# Altium PCB POE-3V3-PCB.PcbDoc
Units mm, origin at the board's own origin, x right, y up, seen from the top; angles counter-clockwise.
Board outline 146.2 x 36.4 mm, 4 copper layers (L1 (Signal), L2 (GND), L3 (GND), L4 (Signal)), stack 1.586 mm thick; 48 components, 33 nets, 149 pads, 19 vias.
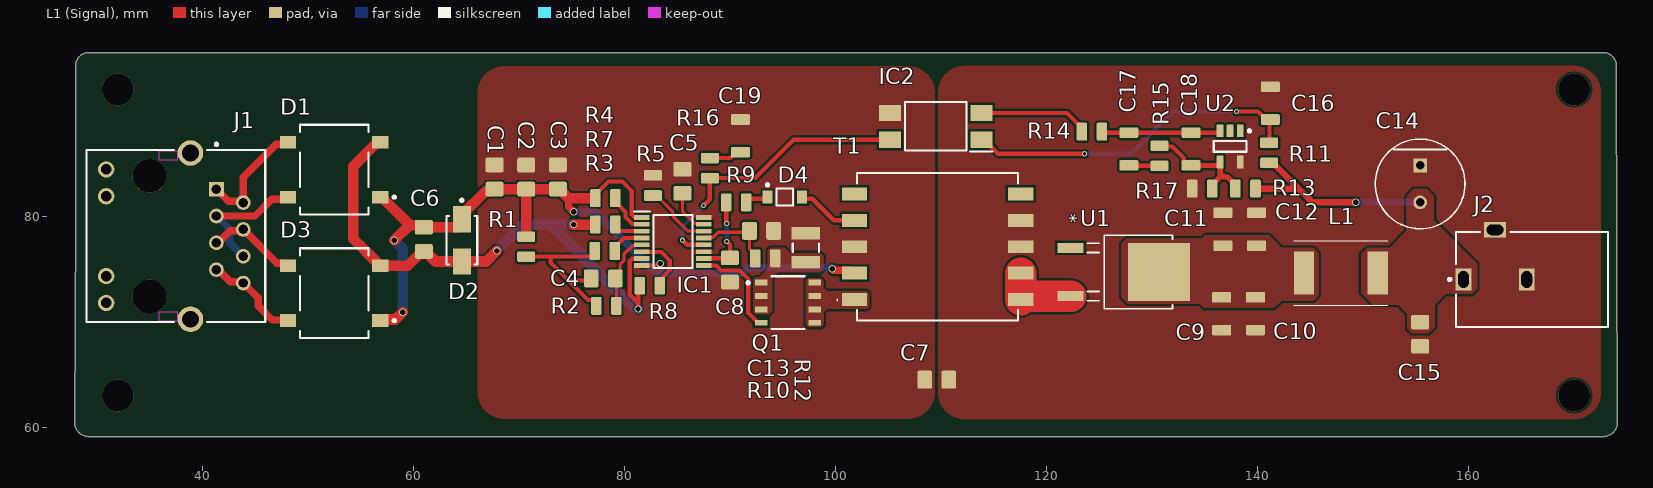
[diagram p0: L1 (Signal) view]
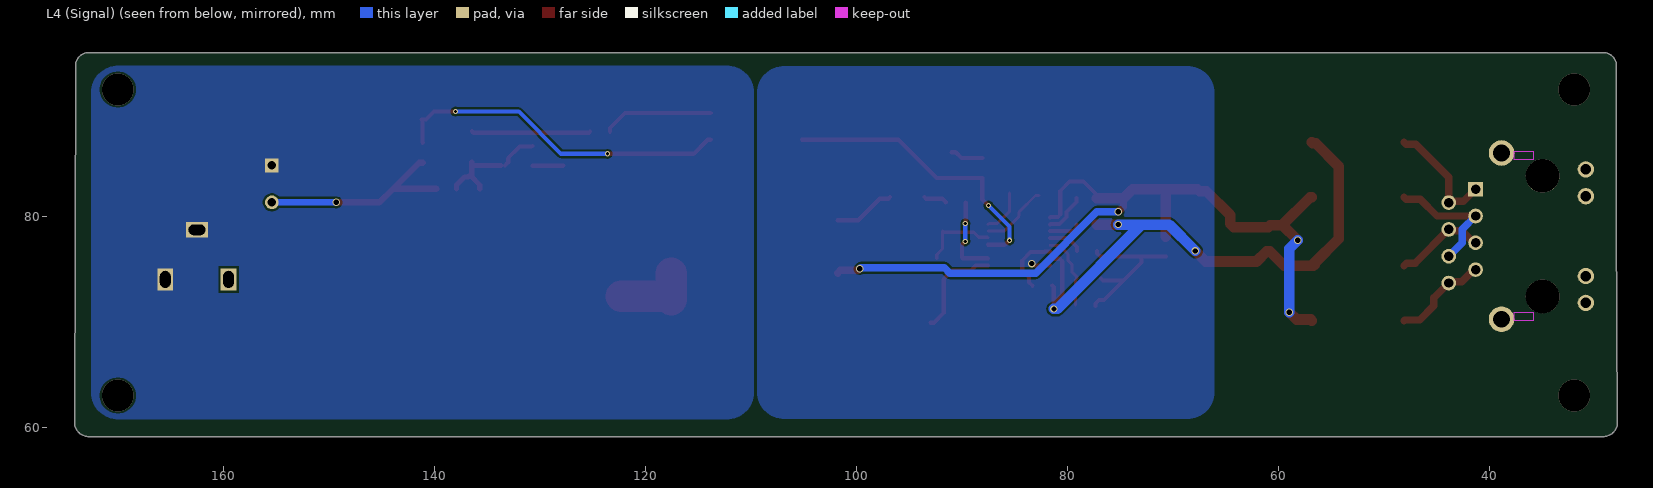
[diagram p1: L4 (Signal) view, seen from below]
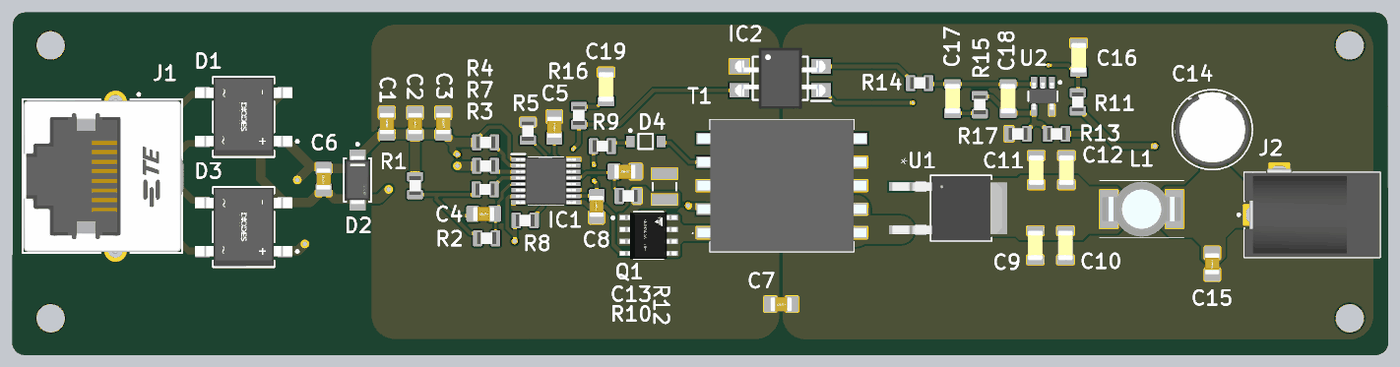
[diagram p2: 3D render of the assembled board from above, using the file's embedded part models]

## Layer stack, top to bottom
Top Solder: solder mask 0.0254, SM-001, Dk 4
L1 (Signal): signal copper 0.035
Dielectric 1: prepreg 0.2104, PP-017, Dk 4.3
L2 (GND): signal copper 0.0152
Dielectric 3: core 1.065, Core-039, Dk 4.8
L3 (GND): signal copper 0.0152
Dielectric 5: prepreg 0.2104, PP-017, Dk 4.3
L4 (Signal): signal copper 0.035
Bottom Solder: solder mask 0.0254, SM-001, Dk 4

## Board outline
27.9,60.47 28,79.5 28,94.23 cw(c29.27,94.23) 29.27,95.5 172.73,95.5 cw(c172.73,94.23) 174,94.23 174.1,60.47 cw(c172.73,60.47) 172.73,59.1 29.27,59.1 cw(c29.27,60.47)

## Design rules (kind name [scope] priority, off if disabled: settings)
Clearance [All] p1: gap=0.2 ignorepadtopadclearanceinfootprint=TRUE
PolygonConnect [All] p1: connectstyle=Direct reliefconductorwidth=0.254 reliefentries=4 polygonreliefangle="90 Angle" airgapwidth=0.254
RoutingVias [All] p1: holewidth=0.6 width=1 viastyle="Through Hole" minholewidth=0.2 minwidth=0.3 maxholewidth=1 maxwidth=1.5
SolderMaskExpansion [All] p1: expansion=0.102 istentingtop=FALSE
SupplyNets "Schematic Supply Nets_2" [InNet('SGND')] p1: voltage=0.000
SupplyNets "Schematic Supply Nets_1" [InNet('+3V3@4A')] p2: voltage=0.000
SupplyNets "Schematic Supply Nets" [InNet('GND')] p3: voltage=0.000
UnRoutedNet [All] p1: checkbadconnections=TRUE
Width [All] p1: maxlimit=3 minlimit=0.2 preferedwidth=0.3 midlayer1_minwidth=0.254 midlayer1_maxwidth=0.254 midlayer1_prefwidth=0.254 midlayer2_minwidth=0.254 midlayer2_maxwidth=0.254 midlayer2_prefwidth=0.254 minimp=50.000000 maximp=50.000000 favimp=50.000000
29 further rules are at their usual default settings.

## Components (designator, comment, footprint, x,y, rotation, side; value= is the part's Value field where it differs from the comment)
C1 "2u2" CAP_0805 67.7,83.7 r270 top
C2 "2u2" CAP_0805 70.7,83.7 r270 top
C3 "2u2" CAP_0805 73.7,83.7 r270 top
C4 "0u22" CAP_0805 78,74.1 r180 top
C5 "47n" CAP_0805 85.5,83.3 r270 top
C6 "0u1" CAP_0805 61,77.8 r90 top
C7 "1n5" CAP_0805 109.6,64.5 r180 top
C8 "1u" CAP_0805 90,74.9 r90 top
C9 "10u" CAP_1206 136.6,70.75 r90 top
C10 "10u" CAP_1206 139.8,70.75 r90 top
C11 "10u" CAP_1206 136.7,78.75 r270 top
C12 "10u" CAP_1206 139.9,78.75 r270 top
C13 "1n" CAP_0805 93,78.6 r180 top
C14 "390u" FP-RAD-TH-D_8_0_5-L_15_1-MFG 155.4,83.05 r270 top
C15 "0u1" CAP_0805 155.4,68.8 r90 top
C16 "1u" CAP_1206 141.2,90.7 r270 top
C17 "4n7" CAP_1206 127.8,86.35 r90 top
C18 "1n" CAP_1206 133.7,86.35 r90 top
C19 "27n" CAP_1206 91,87.6 r90 top
D1 "DF01S" FP-DF-S-MFG 52.5,84.4 r180 top
D2 "SMAJ60A-13-F" FP-SMA-MFG 64.6,77.7 r270 top
D3 "DF01S" FP-DF-S-MFG 52.5,72.7 r180 top
D4 "MMSD4148T1G" ONSC-SOD-123-2-425-04_V 95.2,81.8 r0 top
IC1 "LM5070MTC-50" SOP65P640X120-16N 84.6,77.6 r0 top
IC2 "PS2501L-1-H-A" SOP254P960X400-4N 109.5,88.5 r180 top
J1 "2337993-2" FP-2337993-2-MFG 37.498,78.102 r270 top
J2 "PJ-102BH" CUI-PJ-102BH_V 162.5,74 r0 top
L1 "0.18uH" DO1813H181MLD 147.89,74.6 r0 top
Q1 "SI4848ADY-T1-GE3" FP-C-06527-MFG 95.5,71.8 r0 top
R1 "590k" RES_0805 70.7,77.1 r90 top
R2 "33k2" RES_0805 78.3,71.5 r180 top
R3 "1k" RES_0805 78.15,76.7 r180 top
R4 "24k9" RES_0805 78.2,81.7 r180 top
R5 "12k1" RES_0805 82.7,82.9 r270 top
R7 "DNP" RES_0805 78.2,79.2 r0 top
R8 "107k" RES_0805 82.4,73.4 r0 top
R9 "20" RES_0805 90.6,81.3 r180 top
R10 "100" RES_0805 93.35,76 r180 top
R11 "10" RES_0805 141.1,86 r270 top
R12 "0R33" RESC3126X65X50NL10T20 97.2,77 r270 top
R13 "24k3" RES_0805 138.85,82.6 r180 top
R14 "590" RES_0805 124.3,88 r0 top
R15 "10k" RES_0805 130.7,85.7 r90 top
R16 "1k" RES_0805 88.1,84.55 r90 top
R17 "14k7" RES_0805 134.75,82.6 r180 top
T1 "PA1269NLT" PA1269NLT 109.68,77.1 r270 top
U1 "VS-12CWQ03FN-M3" DPAK_03FN-M3_VIS 128.7,74.7 r270 top
U2 "LMV431AIM5X" DBV0005A_M 137.4,86.6 r270 top

## Footprints (in the part's own frame and the unit in brackets; to place one, negate y for a bottom-side part, rotate by r counter-clockwise, add the part's x,y. Pads: shape width x height; smd on the part's side, far side on the other; paste and mask are expansions set on the pad)
CAP_0805 [mm]
  rrect25% 1.4x1.7 smd: 1(-1.143,0) 2(1.143,0)
  body extent -1.15,-0.76 1.15,0.79, height 1.01
CAP_1206 [mm]
  rrect25% 1x1.8 smd: 1(-1.55,0) 2(1.55,0)
  body extent -1.6,-0.8 1.6,0.8, height 0.94
CUI-PJ-102BH_V [mm] "THD, 3-Leads, Body 14.4x9mm, Height 11mm"
  rect 1.5x2.1 hole 1 slot 1.6 at 90 deg: 1(-3,0) 2(3,0)
  rect 2.1x1.5 hole 1 slot 1.6 at 0 deg: 3(0,4.7)
  silkscreen extent -4.42,-4.5 10.7,4.5, body extent -3.7,-4.5 10.7,4.9, height 11
DBV0005A_M [mm] "SOT23, 5-Leads, Body 3.05x1.75mm, Pitch 0.95mm, IPC Low Density"
  rrect15% 1.2x0.65 smd: 1(-1.475,0.95) 2(-1.475,0) 3(-1.475,-0.95) 4(1.475,-0.95) 5(1.475,0.95)
  silkscreen extent -1.6,-1.55 0.5,1.95, body extent -1.42,-1.46 1.42,1.46, height 1.08
DO1813H181MLD [mm]
  rect 1.91x4.06 smd: 1(-3.49,0) 2(3.49,0)
  silkscreen extent -4.44,-3.05 4.44,3.05, body extent -4.17,-2.92 4.17,2.92, height 5
DPAK_03FN-M3_VIS [mil]
  rect 36.97x97.56 smd paste+0 mask+0: 1(-90.16,-252.5) 3(90.16,-252.5)
  rect 217x233 smd paste+0 mask+0: 2(0,77)
  silkscreen extent -138,-190 138,128, body extent -133,-288 133,173, height 94
FP-2337993-2-MFG [mm]
  round 2.42 hole 1.57 paste-2539.97 mask+0: 1(-7.875,1.39) 2(7.875,1.39)
  rect 1.39x1.39 hole 0.89 paste-2539.97 mask+0: P1(-4.445,3.85)
  round 1.39 hole 0.89 paste-2539.97 mask+0: P2(-3.175,6.39) P3(-1.905,3.85) P4(-0.635,6.39) P5(0.635,3.85) P6(1.905,6.39) P7(3.175,3.85) P8(4.445,6.39)
  round 1.55 hole 1 paste-2539.97 mask+0: P9(-6.325,-6.6) P10(-3.785,-6.6) P11(3.785,-6.6) P12(6.325,-6.6)
  round 3.2 hole 3.2 unplated paste-2539.97 mask+0: ""(-5.715,-2.5) ""(5.715,-2.5)
  Keep-Out Layer region: -8.025,-1.61 -7.225,-1.61 -7.225,0.19 -8.025,0.19
  Keep-Out Layer region: 7.225,-1.61 8.025,-1.61 8.025,0.19 7.225,0.19
  silkscreen extent -8.82,-8.47 8.15,8.47, body extent -9.19,-8.57 9.19,8.57, height 0.25
FP-C-06527-MFG [mm]
  rect 1.194x0.559 smd paste+0 mask+0: 1(-2.527,1.905) 2(-2.527,0.635) 3(-2.527,-0.635) 4(-2.527,-1.905) 5(2.527,-1.905) 6(2.527,-0.635) 7(2.527,0.635) 8(2.527,1.905)
  silkscreen extent -3.9,-2.5 1.56,2.5, body extent -3.22,-2.6 3.22,2.6, height 0.25
FP-DF-S-MFG [mm]
  rect 1.52x1.2 smd paste+0 mask+0: 1(-4.37,2.6) 2(4.37,2.6) 3(-4.37,-2.6) 4(4.37,-2.6)
  silkscreen extent -5.82,-4.26 3.25,4.26, body extent -5.23,-4.36 5.23,4.36, height 0.25
FP-RAD-TH-D_8_0_5-L_15_1-MFG [mm]
  rect 1.3x1.3 hole 0.8 paste-2539.97 mask+0: 1(-1.75,0)
  round 1.3 hole 0.8 paste-2539.97 mask+0: 2(1.75,0)
  silkscreen extent -4.25,-4.25 4.25,4.25, body extent -4.35,-4.35 4.35,4.35, height 0.25
FP-SMA-MFG [mm]
  rect 2.5x1.7 smd paste+0 mask+0: 1(-2,0) 2(2,0)
  silkscreen extent -3.92,-1.46 2.3,1.46, body extent -3.35,-1.56 3.35,1.56, height 0.25
ONSC-SOD-123-2-425-04_V [mm] "SOD, 2-Leads, Body 2.69x1.6mm"
  rect 0.91x1.22 smd: 1(-1.635,0) 2(1.635,0)
  silkscreen extent -1.76,-0.8 0.78,1.28, body extent -1.35,-0.8 1.35,0.8, height 1.35
PA1269NLT [mm]
  rect 1.22x2.4 smd: 1(5,-7.88) 2(2.5,-7.88) 3(0,-7.88) 4(-2.5,-7.88) 5(-5,-7.88) 6(-5,7.88) 7(-2.5,7.88) 8(0,7.88) 9(2.5,7.88) 10(5,7.88)
  silkscreen extent -7,-9.55 7,7.63, body extent -7,-8.96 7,8.96, height 12.42
RES_0805 [mm]
  rrect25% 1x1.7 smd: 1(-0.95,0) 2(0.95,0)
  body extent -1,-0.63 1,0.63, height 0.47
RESC3126X65X50NL10T20 [mm] "Chip Resistor, 2-Leads, Body 3.10x2.60mm, IPC Medium Density"
  rect 1.15x2.7 smd: 1(-1.375,0) 2(1.375,0)
  silkscreen extent -0.4,-1.25 0.4,1.25, body extent -1.6,-1.35 1.6,1.35, height 0.65
SOP65P640X120-16N [mm]
  rect 1.475x0.45 smd: 1(-2.938,2.275) 2(-2.938,1.625) 3(-2.938,0.975) 4(-2.938,0.325) 5(-2.938,-0.325) 6(-2.938,-0.975) 7(-2.938,-1.625) 8(-2.938,-2.275) 9(2.938,-2.275) 10(2.938,-1.625) 11(2.938,-0.975) 12(2.938,-0.325) 13(2.938,0.325) 14(2.938,0.975) 15(2.938,1.625) 16(2.938,2.275)
  silkscreen extent -3.67,-2.5 1.85,2.85, body extent -3.2,-2.5 3.2,2.5, height 1.13
SOP254P960X400-4N [mm]
  rect 2.1x1.55 smd: 1(-4.325,1.27) 2(-4.325,-1.27) 3(4.325,-1.27) 4(4.325,1.27)
  silkscreen extent -5.38,-2.3 2.93,2.39, body extent -4.8,-3.25 4.8,3.25, height 3.55

## Part data
C1 C2 C3 C4 C5 C6 C7 C8 C13: library part CAP_0805, "Capacitor SMD 0805", Rating=100V
C9 C10 C11 C12 C16 C17 C18 C19: library part CAP_1206, "Capacitor SMD 1206", Rating=10V
C14: library part CMP-05427-000460-1, "Aluminum Electrolytic Capacitors (Radial Lead Type) 390uF ±20% 25V", Capacitance=390uF, Case/Package=Radial, Dielectric Material=Aluminium, ESR (Equivalent Series Resistance)=41mR, Max Operating Temperature=105°C, Min Operating Temperature=-40°C, Package Quantity=200, Ripple Current=1.24A, Tolerance=20%, Voltage=25V, Construction=RADIAL, Diameter=8mm, Height=15mm, Height - Seated (Max)=0.65inch, Impedance=41mR, Lead Diameter=0.6mm, Lead Pitch=3.5mm, Length=15mm, Life (Hours)=8000Hour, Mount="Through Hole", Number of Pins=2, Packaging=Bulk, Radiation Hardening=No, REACH SVHC="No SVHC", Ripple Current (AC)=1.24A, RoHS Compliant=Yes, Series=FR, Termination=Radial, Voltage Rating=25V, Voltage Rating (DC)=25V
C15: library part CAP_0805, "Capacitor SMD 0805", Rating=10V
D1 D3: library part CMP-12791-000062-1, "BRIDGE RECT 1PHASE 100V 1A DFS", Average Rectified Current=1A, Capacitance=25pF, Case/Package=SMD/SMT, Forward Voltage=1.1V, Max Operating Temperature=150°C, Max Repetitive Reverse Voltage (Vrrm)=100V, Max Reverse Current=10A, Max Surge Current=50A, Min Operating Temperature=-65°C, Package Quantity=50, Reverse Voltage (DC)=70V, Current Rating=1A, Element Configuration=Single, Height=3.4mm, Lead Free="Lead Free", Length=8.51mm, Mount="Surface Mount", Number of Elements=1, Number of Pins=4, Output Current=1A, Packaging=Rail/Tube, Peak Non-Repetitive Surge Current=50A, Radiation Hardening=No, RoHS Compliant=Yes, Series=-, Termination=SMD/SMT, Voltage Rating (DC)=100V, Weight=0.010547oz, Width=6.5mm
D2: library part CMP-12828-000005-1, "TVS DIODE 60V 96.8V SMA", Breakdown Voltage=66.7V, Clamping Voltage=96.8V, Manufacturer="Diodes Inc.", Max Junction Temp=+150°C, Package=SMA, Peak Pulse Current=4.1A, Peak Pulse Power=400W, Reverse Standoff Voltage=60V, Temperature="-55°C to +150°C", Temperature Range Low=-55°C, Automotive=No, Category=Diode, ComponentLink2Description=Datasheet, ComponentLink2URL=https://www.diodes.com/assets/Datasheets/ds19005.pdf, Device Class L1="Circuit Protection", Device Class L2="TVS Diodes", Device Class L3=unset, Digikey Description="TVS DIODE 60V 96.8V SMA", Direction=Unidirectional, Footprint Url=https://www.diodes.com/assets/Package-Files/SMA.pdf, Height=2.4mm, Lead Free=Yes, Manufacturer Part Number=SMAJ60A-13-F, Number Of Channels=1, Octopart=https://octopart.com/smaj60a-13-f-diodes+inc.-350240, RoHS=TRUE, Standoff Height=0.05mm, Temperature Range High=+150°C
D4: library part CMP-0895-00001-2, "Switching Diode, 2-Pin SOD-123, Pb-Free, Tape and Reel", Manufacturer="On Semiconductor", ComponentLink1Description="Manufacturer URL", ComponentLink1URL=http://www.onsemi.com/, ComponentLink2Description=Datasheet, ComponentLink2URL=http://www.onsemi.com/pub_link/Collateral/MMSD4148T1-D.PDF, ComponentLink3Description="Package Specification", ComponentLink3URL=http://www.onsemi.com/pub_link/Collateral/425-04.PDF, Configuration=Single, DatasheetVersion="Rev. 11", IF Max (A)=0.2, Mounting Technology="Surface Mount", PackageDescription="2-Pin SOD, Body 1.6 x 2.69 mm", PackageReference=SOD-123-2-425-04, PackageVersion="Rev. G, 10/2009", Packing="Tape and Reel", PartNumber=MMSD4148T1G, RoHS=TRUE, trr Max (ns)=4
IC1: "Integrated Circuit", Manufacturer_Name="Texas Instruments", Mouser Part Number=926-LM5070MTC-50, Datasheet Link=https://www.ti.com/lit/ds/symlink/lm5070.pdf?ts=1651300488434&ref_url=https%253A%252F%252Fwww.ti.com%252Fstore%252Fti%252Fen%252Fp%252Fproduct%252F%253Fp%253DLM5070MTC-50%252FNOPB, Height=1.2mm, Manufacturer_Part_Number=LM5070MTC-50, Mouser Price/Stock=https://www.mouser.com/Search/Refine.aspx?Keyword=926-LM5070MTC-50
IC2: "Integrated Circuit", Manufacturer_Name="Renesas Electronics", Mouser Part Number=968-PS2501L-1-H-A, Arrow Part Number=PS2501L-1-H-A, Arrow Price/Stock=https://www.arrow.com/en/products/ps2501l-1-h-a/renesas-electronics, Datasheet Link=https://www.mouser.in/datasheet/2/286/ps2501-34138.pdf, Height=4mm, Manufacturer_Part_Number=PS2501L-1-H-A, Mouser Price/Stock=https://www.mouser.co.uk/ProductDetail/Renesas-Electronics/PS2501L-1-H-A?qs=%252B6g0mu59x7Jv3GhOeMO0tw%3D%3D
J1: library part CMP-03371-000017-1, "RJ45 JACK MAG. POE 10/100 LED 1X", Manufacturer="TE Connectivity", Temperature="-40°C to +85°C", Temperature Range High=+85°C, Temperature Range Low=-40°C, Automotive=No, Category=Conn, ComponentLink2Description=Datasheet, ComponentLink2URL=https://www.te.com/commerce/DocumentDelivery/DDEController?Action=showdoc&DocId=Customer+Drawing%7F2337993-2%7FA%7Fpdf%7FEnglish%7FENG_CD_2337993-2_A.pdf%7F2337993-2, Conn Gender=Female, Conn Orientation=Vertical, Contact Material=Gold,Nickel, Device Class L1=Connectors, Device Class L2="Modular / Ethernet Connectors", Device Class L3=unset, Digikey Description="RJ45 JACK MAG. POE 10/100 LED 1X", Height=17.15mm, Is Female=yes, Lead Free=Yes, Manufacturer Part Number=2337993-2, Number Of Contacts=8, Octopart=https://octopart.com/2337993-2-te+connectivity-99778114, Package=2337993-2, Pitch=1.27mm, RoHS=TRUE, Shielding=true
J2: library part CMP-2000-06901-1, "Through Hole Right Angle DC Power Jack, 5 A, 2.5 mm Center Pin, 3 Position, -25 to 85 degC, RoHS, Bulk", Current Rating=5A, Flammability Rating=UL94V-0, Insulation Resistance=100MOhms, Manufacturer=CUIInc., Operating Temperature Range=-25Cto+85C, Package Description="3-Pin Through Hole Device, Body 14.4 x 9 mm, Height 11 mm", Voltage Rating=24V, Brand=CUI, Connector Type=DCPowerJack, Contact Gender=Male, Contact Material=Copper, Contact Plating=Nickel, Datasheet URL=http://www.cui.com/product/resource/pj-102bh.pdf, Datasheet Version="Rev. 1.02, 05/2016", Factory Pack Quantity=280, Housing Material=PolybutyleneTerephthalate(PBT), Inside Contact Diameter=2.5mm, Manufacturer URL=http://www.cui.com/, Mounting Angle=Right, Mounting Style=ThroughHole, Mounting Technology=ThroughHole, Outside Contact Diameter=6.5mm, Package Reference=PJ-102BH, Product=Jacks, Product Category=DCPowerConnectors, RoHS=True, Termination Style=ThroughHole
L1: library part DO1813H-181MLD, "Inductor", Manufacturer_Name=COILCRAFT, Mouser Part Number=994-DO1813H-181MLD, Datasheet Link=https://ms.componentsearchengine.com/Datasheets/1/DO1813H-181MLD.pdf, Height=5mm, Manufacturer_Part_Number=DO1813H-181MLD, Mouser Price/Stock=https://www.mouser.co.uk/ProductDetail/Coilcraft/DO1813H-181MLD?qs=zCSbvcPd3pZl8OzSYavKew%3D%3D
Q1: library part CMP-02550-000028-1, "MOSFET N-CH 150V 5.5A 8SOIC", Continuous Drain Current=3.9A, Drain To Source Breakdown Voltage=150V, Drain To Source Resistance=0.07Ω, Gate To Source Voltage=20V, Input Capacitace At Vds="335pF @ 75V", Manufacturer=Vishay, Max Forward Diode Voltage=1.2V, Max Junction Temp=+150°C, Package=C-06527, Power Dissipation=2.5W, Pulse Drain Current=20A, Temperature="-55°C to +150°C", Temperature Range Low=-55°C, Typ Forward Diode Voltage=0.85V, Automotive=No, Category=Trans, ComponentLink2Description=Datasheet, ComponentLink2URL=https://www.vishay.com/docs/77716/si4848ady.pdf, Depletion Mode=False, Device Class L1="Discrete Semiconductors", Device Class L2=Transistors, Device Class L3=MOSFETs, Digikey Description="MOSFET N-CH 150V 5.5A 8SOIC", Drain To Source Voltage=150V, Footprint Url=https://www.vishay.com/docs/68964/si4838bd.pdf, Gate Charge At Vgs="6.5nC @ 10V", Height=1.75mm, Ipc Land Pattern Name=SOIC127P600X155-8, Lead Free=Yes, Manufacturer Part Number=SI4848ADY-T1-GE3, Mouser Description="ThunderFET Power MOSFET N-Channel Single 150V VDS ±20V VGS 5.5A ID 8-Pin SOIC T/R", Number Of Channels=1, Number Of N Channels=1, Octopart=https://octopart.com/si4848ady-t1-ge3-vishay-88182557, Reverse Recovery Charge=110nC, Reverse Recovery Time=57ns, RoHS=TRUE, Rthja Max=43°C/W, Standoff Height=0.1mm, Temperature Range High=+150°C, Threshold Vgs Max=4V, Threshold Vgs Min=2V, Transconductance=5S, Turn Off Delay Time=12ns, Turn On Delay Time=8ns
R1 R2 R3 R4 R5 R7 R8 R9 R10 R11 R13 R14 R15 R16 R17: library part RES_0805, "Resistor SMD 0805"
R12: library part CMP-2005-02086-1, Manufacturer=Yageo, Part Number=RL1210FR-070R33L
T1: "Transformer", Manufacturer_Name=PULSE, Mouser Part Number=673-PA1269NLT, Arrow Part Number=PA1269NLT, Arrow Price/Stock=https://www.arrow.com/en/products/pa1269nlt/pulse-electronics-corporation, Datasheet Link=https://productfinder.pulseeng.com/products/datasheets/P675.pdf, Height=12.32mm, Manufacturer_Part_Number=PA1269NLT, Mouser Price/Stock=https://www.mouser.co.uk/ProductDetail/Pulse-Electronics/PA1269NLT?qs=1CGoW%2F3pMwr7YASnA15U5A%3D%3D
U1: "Schottky - D-PAK", Manufacturer_Name=Vishay, Copyright="Copyright (C) 2025 Ultra Librarian. All rights reserved.", Datasheet=https://www.vishay.com/doc?93285, Manufacturer_Part_Number=VS-12CWQ03FN-M3, RefDes=RefDes, Type=Type
U2: library part CMP-0063-00864-3, "Low-Voltage (1.24V) Adjustable Precision Shunt Regulators, 5-pin SOT-23", Manufacturer="Texas Instruments", PackageTopMarking=N08A*XTT, PowerWise=N, ComponentLink1Description="Datasheet URL", ComponentLink1URL=http://www.ti.com/general/docs/lit/getliterature.tsp?genericPartNumber=LMV431A&fileType=pdf, CompType=MiscPower, PackageDescription="Molded SOT-23, .115 x .063 x .040 in Body, 5 Lead, .0375 in Pitch", PackageReference=DBV0005A, PinCount=5, RoHS=N

## Via types
v1: diameter 0.7, hole 0.5, L1 (Signal) to L4 (Signal), 9 vias
v2: diameter 0.5, hole 0.3, L1 (Signal) to L4 (Signal), 6 vias
v3: diameter 3, hole 3, L1 (Signal) to L4 (Signal), 4 vias

## Nets (pads, with @x,y where several pads share a name; then routed paths per layer and width w, separated by ;. In a path a pad name is that pad's centre, name@x,y a point inside that pad or via, vN(x,y) a via of type N, cw(c..) or ccw(c..) an arc to the next point about the centre after c; other vN are vias at no path point)
+3V3@4A: C14.2 C15.2 J2.1 L1.2 R11.2 R13.1 | length 20
  L1 (Signal) w0.6: R13.1 143.9,82.6 ; R11.2 141.45,85.05 143.9,82.6 ; v1(149.3,81.3) 145.2,81.3 143.9,82.6
  L4 (Signal) w0.6: v1(149.3,81.3) C14.2
GND: C1.1 C2.1 C3.1 C5.1 C7.2 C8.1 C13.1 C19.2 IC1.8 IC1.11 IC1.16 IC2.3 R5.1 R12.1 T1.3 | length 1.8
  L1 (Signal) w0.4: IC1.8 83.144,75.325 83.319,75.5 v1(83.4,75.5)
LM_COMP: IC1.12 IC2.4 R16.1 | length 27.8
  L1 (Signal) w0.4: v2(85.5,77.7) 85.527,77.7 85.952,77.275 IC1.12 ; v2(87.5,81) 87.5,81.002 88.1,81.602 R16.1 92.4,83.6 96.03,87.23 IC2.4
  L4 (Signal) w0.4: v2(85.5,77.7) 85.5,79 v2(87.5,81)
LM_CS: C13.2 IC1.13 R10.2 | length 7.4
  L1 (Signal) w0.3: IC1.13 87.613,78 88.42,78 88.894,78.473 91.73,78.473 C13.2 91.857,76.893 92.4,76.35 R10.2
LM_OUT: IC1.9 Q1.4 | length 9.6
  L1 (Signal) w0.4: IC1.9 88.705,75.325 89.173,74.857 90.913,74.857 91.745,74.026 91.745,70.806 92.656,69.895 Q1.4
LM_RCLASS: IC1.3 R7.2 | length 3
  L1 (Signal) w0.381: R7.2 79.15,78.885 79.46,78.575 IC1.3
LM_RCLP: IC1.6 R8.2 | length 5.8
  L1 (Signal) w0.381: IC1.6 82.175,76.625 82.209,76.59 83.51,76.59 84.3,75.8 84.3,74.883 83.66,74.242 83.66,73.71 R8.2
LM_RSIG: IC1.2 R4.1 | length 4
  L1 (Signal) w0.381: R4.1 79.15,81.35 80.106,80.394 80.106,79.906 80.752,79.259 81.628,79.259 IC1.2
LM_RT: IC1.14 R5.2 | length 6.5
  L1 (Signal) w0.3: R5.2 83.05,81.95 84.6,80.4 84.6,80 86.025,78.575 IC1.14
LM_SS: C5.2 IC1.15 | length 4.2
  L1 (Signal) w0.3: C5.2 85.5,80.456 86.656,79.3 87.463,79.3 IC1.15
LM_ULVRCR: C4.2 R1.1 R2.2 R3.2 | length 15.9
  L1 (Signal) w0.381: R1.1 73.212,76.15 ; C4.2 76.657,73.9 74.7,73.9 ; R3.2 77.2,76.46 76.89,76.15 73.212,76.15 ; R2.2 77.35,71.727 77.04,72.037 76.563,72.037 74.7,73.9 ; 73.212,76.15 72.989,75.927 72.989,75.611 74.7,73.9
LM_UVLO: IC1.4 R3.1 | length 3.3
  L1 (Signal) w0.381: R3.1 79.1,77.05 79.975,77.925 IC1.4
LM_UVLORTN: C4.1 IC1.5 R2.1 | length 7.1
  L1 (Signal) w0.3: C4.1 79.25,73.993 R2.1@79.25,71.607 ; C4.1@79.143,74.25 79.572,74.679 79.572,75.4 79.95,75.778 79.95,76.37 80.78,77.2 81.587,77.2 IC1.5
LM_VCC: C8.2 IC1.10 R9.2 | length 7.9
  L1 (Signal) w0.4: IC1.10 87.563,76 89.957,76 C8.2 90,77.3 v2(89.7,77.6) ; R9.2 89.65,79.377 89.7,79.327 v2(89.7,79.3)
  L4 (Signal) w0.4: v2(89.7,77.6) v2(89.7,79.3)
OPT_AN: C16.2 IC2.1 R11.1 | length 32.1
  L1 (Signal) w0.4: IC2.1 114.1,87.23 115.43,85.9 v2(123.6,85.9) ; v2(138,89.9) 140.05,89.9 140.8,89.15 C16.2 141.125,89.075 141.125,86.975 R11.1
  L4 (Signal) w0.4: v2(123.6,85.9) 128,85.9 132,89.9 v2(138,89.9)
OPT_COL_RC: C19.1 R16.2 | length 3.1
  L1 (Signal) w0.4: R16.2 90.05,85.5 90.6,86.05 C19.1
OPT_KA: IC2.2 R14.1 | length 10.5
  L1 (Signal) w0.4: IC2.2 121.93,89.77 123.35,88.35 R14.1
OUT_IND: C9.2 C10.2 C11.2 C12.2 L1.1 U1.2
QTRAN_D: Q1.5 Q1.6 Q1.7 Q1.8 T1.1
QTRAN_S: Q1.1 Q1.2 Q1.3 R10.1 R12.2
REG_C_R: C17.1 R15.1 | length 2.9
  L1 (Signal) w0.4: C17.1 127.825,84.775 130.675,84.775 R15.1
REG_KA: C17.2 C18.2 R14.2 U2.3 | length 11.3
  L1 (Signal) w0.4: R14.2 125.35,87.9 C17.2 C18.2 136.325,87.9 136.45,88.025 U2.3
REG_REF: C18.1 R13.2 R15.2 R17.1 U2.4 | length 11.7
  L1 (Signal) w0.4: R15.2 130.766,86.584 131.916,86.584 133.012,85.488 133.012,85.1 C18.1@133.312,84.8
  L1 (Signal) w0.5: C18.1 136.375,84.8 136.45,84.875 U2.4 136.45,84.05 ; R17.1 135.7,82.95 136.45,83.7 136.45,84.05 ; R13.2 137.9,82.95 137.154,83.696 136.804,83.696 136.45,84.05
RJ_NEG1: D1.2 J1.P3 J1.P6 | length 12.4
  L1 (Signal) w0.7: J1.P3 45.007,80.007 46.6,81.6 47.93,81.6 D1.2
  L4 (Signal) w0.7: J1.P3 42.618,78.737 42.618,77.467 J1.P6
RJ_NEG2: D3.2 J1.P7 J1.P8 | length 9.4
  L1 (Signal) w0.7: J1.P7 41.535,74.927 42.673,73.789 43.756,73.789 J1.P8@44.02,73.525 ; J1.P8 45.3,72.245 45.3,71.5 46.643,70.157 48.073,70.157 D3.2
RJ_POS1: D1.4 J1.P1 J1.P2 | length 11.1
  L1 (Signal) w0.7: J1.P1 42.486,81.409 43.756,81.409 J1.P2 43.888,83.688 47,86.8 47.93,86.8 D1.4
RJ_POS2: D3.4 J1.P4 J1.P5 | length 8.7
  L1 (Signal) w0.7: J1.P5 41.535,77.467 42.673,78.605 43.756,78.605 J1.P4 47.075,75.55 47.88,75.55 D3.4
SGND: C7.1 C9.1 C10.1 C11.1 C12.1 C14.1 C15.1 C16.1 J2.2 J2.3 R17.2 T1.7 T1.8 U2.5
TRAND_AN: D4.2 T1.4 | length 5.9
  L1 (Signal) w0.4: D4.2 96.99,81.645 97.8,81.645 99.845,79.6 T1.4
TRAND_KA: D4.1 R9.1 | length 2.2
  L1 (Signal) w0.4: R9.1 91.55,81.345 91.85,81.645 93.41,81.645 D4.1
TROUTRECT_A: T1.9 T1.10 U1.3 | length 7.4
  L1 (Signal) w3: T1.9 T1.10 117.87,72.41 U1.3
VNEG: C6.1 D1.3 D2.2 D3.3 IC1.7 R7.1 R8.1 | length 56.1
  L1 (Signal) w0.4: v1(81.3,71.2) 81.319,71.219 81.319,71.781 ; R8.1 81.319,73.269 81.319,71.781 ; IC1.7 81.637,75.95 80.734,75.95 80.5,75.716 80.5,72.6 81.319,71.781
  L1 (Signal) w1: D1.3 56.77,86.9 56.5,86.9 54.3,84.7 54.3,77.87 56.61,75.56 56.61,75.4 56.71,75.3 D3.3 59.493,75.3 60.85,76.657 C6.1 ; C6.1@61.15,76.657 62.107,75.7 D2.2 66.9,75.7 v1(67.9,76.7) ; v1(75.2,79.2) R7.1
  L4 (Signal) w1: v1(67.9,76.7) 70.4,79.2 73,79.2 ; v1(75.2,79.2) 73,79.2 ; v1(81.3,71.2) 81,71.2 73,79.2
VPOS: C1.2 C2.2 C3.2 C6.2 D1.1 D2.1 D3.1 IC1.1 R1.2 R4.2 T1.2 | length 78.7
  L1 (Signal) w0.381: R4.2@77.25,82.05 78.5,83.3 79.8,83.3 80.7,82.4 80.7,80.133 80.923,79.909 81.627,79.909 IC1.1
  L1 (Signal) w0.7: 74.707,81.7 74.707,80.893 v1(75.2,80.4) ; v1(99.7,75) 99.84,74.86 101.54,74.86 T1.2
  L1 (Signal) w1: D3.1 56.97,70.2 58.3,70.2 v1(59,70.9) ; D1.1 57.03,81.8 59.687,79.143 ; v1(58.2,77.7) 59.643,79.143 59.687,79.143 ; R1.2 C2.2 ; R4.2 74.707,81.7 73.85,82.557 C3.2 C2.2 ; 59.687,79.143 60.8,79.143 C6.2 64.243,78.943 64.6,79.3 D2.1 64.6,80.1 66.857,82.357 67.5,82.357 C1.2 C2.2
  L4 (Signal) w0.7: v1(75.2,80.4) 77.227,80.4 83.027,74.6 91.164,74.6 91.664,75.1 99.6,75.1 v1(99.7,75)
  L4 (Signal) w1: v1(58.2,77.7) 59,76.9 v1(59,70.9)
pads on no net: J1. J1.1 J1.2 J1.P9 J1.P10 J1.P11 J1.P12 T1.5 T1.6 U1.1 U2.1 U2.2
copper on no net:
  other v3: 32,63 170,63 32,92 170,92

## Polygon pours and split planes (outlines as drawn)
SGND on L1 (Signal) "SGND_L01_P013" (solid, pour order 13): 109.75,91.71 cw(c112.29,91.71) 112.29,94.25 169.96,94.25 cw(c169.96,91.71) 172.5,91.71 172.5,63.29 cw(c169.96,63.29) 169.96,60.75 112.29,60.75 cw(c112.29,63.29) 109.75,63.29
+3V3@4A on L1 (Signal) "+3V3@4A_L01_P007" (solid, pour order 7): 150.4,77 149.8,76.4 149.8,72.7 150.9,71.6 153.3,71.6 154.2,70.7 154.2,69.3 154.6,68.9 156.2,68.9 156.8,69.5 156.8,71.6 157.8,72.6 160.3,72.6 160.8,73.1 160.8,75.5 156.7,79.6 156.7,81.9 156,82.6 154.8,82.6 154.1,81.9 154.1,78.6 152.5,77
GND on L1 (Signal) "GND_L01_P015" (solid, pour order 15): 109.4,91.66 ccw(c106.86,91.66) 106.86,94.2 68.64,94.2 ccw(c68.64,91.66) 66.1,91.66 66.1,63.34 ccw(c68.64,63.34) 68.64,60.8 106.86,60.8 ccw(c106.86,63.34) 109.4,63.34
QTRAN_D on L1 (Signal) "QTRAN_D_L01_P003" (solid, pour order 3): 97.4,74.1 97.2,73.9 97.2,69.7 97.4,69.5 98.7,69.5 98.9,69.7 98.9,70.9 99.2,71.2 103,71.2 103.2,71.4 103.2,72.7 103,72.9 99.2,72.9 98.9,73.2 98.9,73.8 98.6,74.1
QTRAN_S on L1 (Signal) "QTRAN_S_L01_P002" (solid, pour order 2): 92.2,70.9 92.4,70.7 93.7,70.7 94,71 94,74.1 94.6,74.7 98.6,74.7 98.9,75 98.9,76.2 98.6,76.5 95.7,76.5 95.2,77 93.8,77 93.6,76.8 93.6,75 92.8,74.2 92.4,74.2 92.2,74
OUT_IND on L1 (Signal) "OUT_IND_L01_P001" (solid, pour order 1): 141.1,78.2 142.3,77 145.3,77 145.8,76.5 145.8,72.5 145.3,72 142.3,72 141.6,71.3 134.9,71.3 134.5,71.7 127.7,71.7 127.1,72.3 127.1,77.4 127.6,77.9 134.7,77.9 135,78.2
GND on L4 (Signal) "GND_L04_P021" (solid, pour order 21): 109.4,91.66 ccw(c106.86,91.66) 106.86,94.2 68.64,94.2 ccw(c68.64,91.66) 66.1,91.66 66.1,63.34 ccw(c68.64,63.34) 68.64,60.8 106.86,60.8 ccw(c106.86,63.34) 109.4,63.34
SGND on L4 (Signal) "SGND_L04_P020" (solid, pour order 20): 109.75,91.71 cw(c112.29,91.71) 112.29,94.25 169.96,94.25 cw(c169.96,91.71) 172.5,91.71 172.5,63.29 cw(c169.96,63.29) 169.96,60.75 112.29,60.75 cw(c112.29,63.29) 109.75,63.29

## Text inside footprints (layer, text, board x,y; h text height)
U1: Mechanical 13 "*" at 125.208,77.308 h1.27 r270; Top Overlay "*" at 121.652,80.233 h1.27 r270